# EAGLE board MK1 (EAGLE 9.6.2)
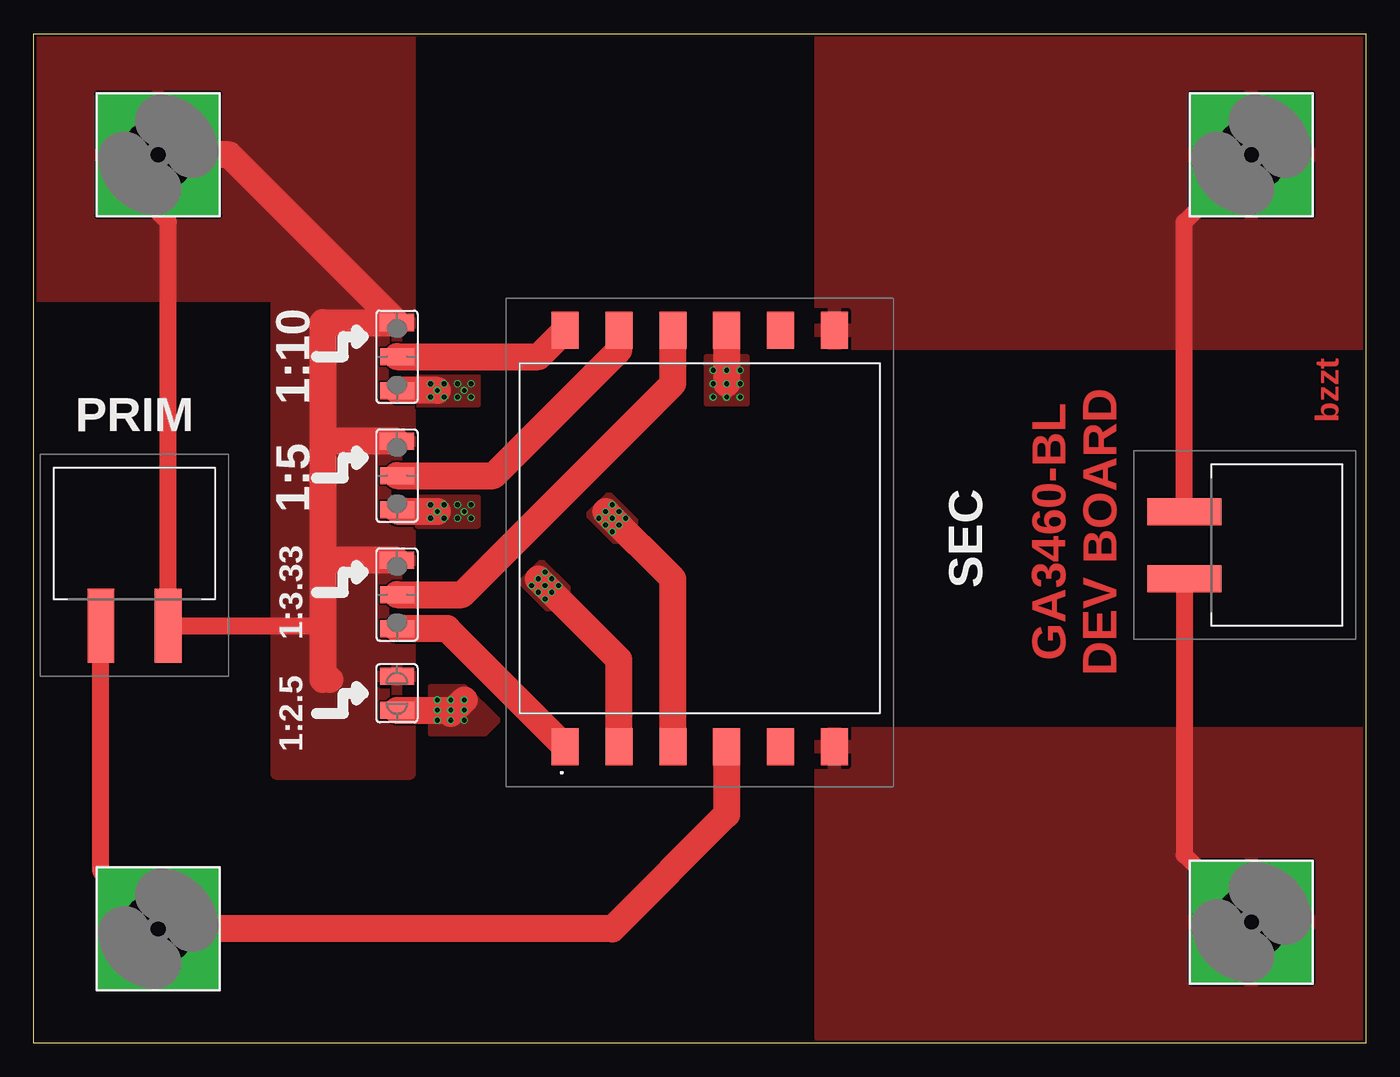
[diagram p0: board, top side]
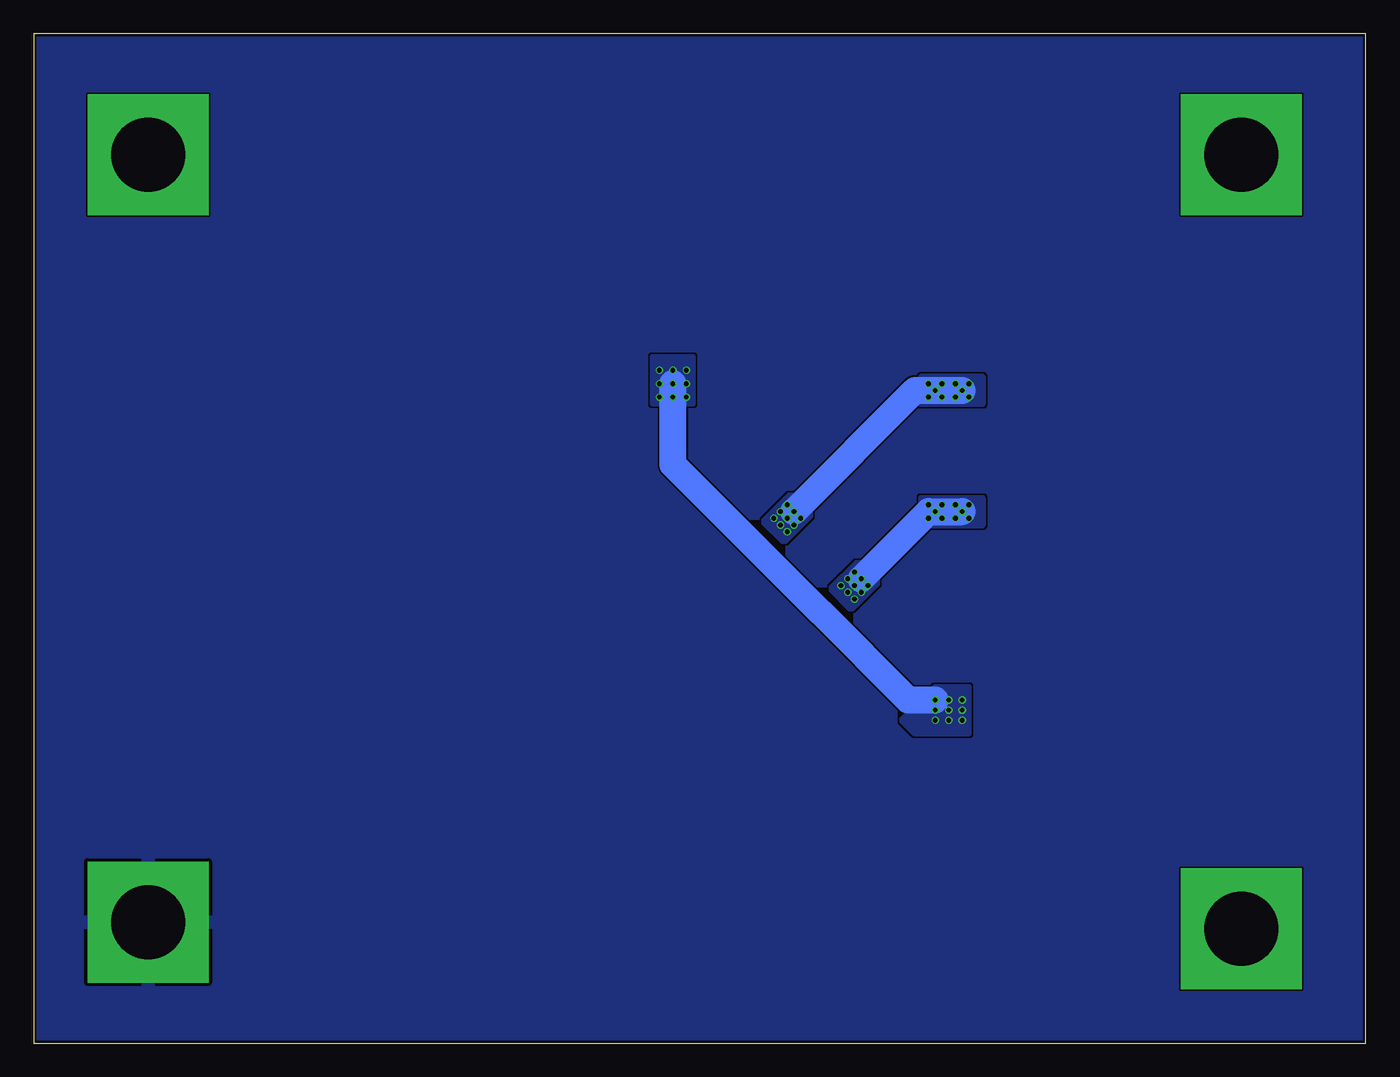
[diagram p1: board, bottom side, seen from below]

Size 99 x 75 mm. Coordinates in mm from the lower left corner, seen from the top.
Outline: 0,0 0,75 99,75 99,0 0,0
Copper layers (1*16): Top 0.035559375mm / dielectric 1.6mm / Bottom 0.035559375mm
Design rules "jlcpcb2layer *": minimum track width 5mil, minimum drill 12mil, track to track 5mil, track to pad 5mil, pad to pad 5mil, via to via 5mil, smd to smd 5mil, copper to edge 8mil, drill to drill 6mil, minimum pad ring 5mil, minimum via ring 3mil, stop-mask expansion 2.5mil, vias tented up to drill 15mil, thermal gap 10mil
Net classes: 1 Vias: clearance 0.076 mm

## Footprints (pad centres in the part's own frame; a part is rotated, then mirrored left to right if it is on the bottom)
GA3460BL = smd 2 x 2.75: 1 -10,-15.475; 2 -6,-15.475; 3 -2,-15.475; 4 2,-15.475; 5 6,-15.475; 6 10,-15.475; 7 10,15.475; 8 6,15.475; 9 2,15.475; 10 -2,15.475; 11 -6,15.475; 12 -10,15.475
5,5-PAD-SQUARE = drill 5.5 pad 9 square: B5,5 0,0
SJ_2W = smd 1.27 x 2.54: 1 -2.54,0; 2 0,0; 3 2.54,0
SJW = smd 1.27 x 2.54: 1 -1.27,0; 2 1.27,0
23059082 = smd 2 x 5.5: 1 -2.5,-4.5; 2 2.5,-4.5

## Placement (x,y rotation side)
E$1  [GA3460BL]  49.5,37.5 0 top
E$2  [5,5-PAD-SQUARE]  9.25,66 0 top
E$3  [5,5-PAD-SQUARE]  9.25,8.5 0 top
E$4  [SJ_2W]  27,33.33 270 top
E$5  [5,5-PAD-SQUARE]  90.5,66 0 top
E$6  [SJW]  27,26 90 top
E$7  [5,5-PAD-SQUARE]  90.5,9 0 top
E$8  [SJ_2W]  27,51 270 top
E$9  [SJ_2W]  27,42.17 270 top
E$10  [23059082]  90,37 270 top
E$11  [23059082]  7.5,35.5 0 top

## Library data of the parts
E$1 E$10 E$11 = SamacSys_Parts
E$2 E$3 E$5 E$7 = holes
E$4 E$6 E$8 E$9 = jumper

## Nets
1: E$1.1 E$4.3
2 [Vias]: E$1.2 E$9.3
3 [Vias]: E$1.3 E$8.3
9 [Vias]: E$1.9 E$6.1
10: E$1.10 E$4.2
11: E$1.11 E$9.2
12: E$1.12 E$8.2
GND: E$1.6 E$7.B5,5 E$10.2
OUT: E$2.B5,5 E$4.1 E$6.2 E$8.1 E$9.1 E$11.2
S$2: E$1.4 E$3.B5,5 E$11.1
SEC: E$1.7 E$5.B5,5 E$10.1

## Tracks (layer width: path | path; a pad name or v marks a point on that pad's centre or on a via)
1
  Top 2: E$1.1 30.73,30.79 E$4.3
2  (via drill 0.35)
  Top 1.27: 27.13,39.5 E$9.3
  Top 2: v37.5,34.5 v38,34 v38.5,33.5 43.5,28.5 E$1.2 | v30,39.5 27.13,39.5
  Bottom 2: v37.5,34.5 32.5,39.5 v30,39.5
  other vias: 38,35 38.5,34.5 39,34 37.5,33.5 38,33 37,34 30.5,40 31.5,40 32.5,40 32.5,39 31.5,39 30.5,39 29.5,40 29.5,39 32,39.5
  pour Top: 37.75,35.75 36.25,34.25 38.25,32.25 39.75,33.75
  pour Bottom (isolate 0.254): 37.75,35.75 36.25,34.25 38.25,32.25 39.75,33.75
  pour Bottom (isolate 0.254): 28.5,40.5 28.5,38.5 33,38.5 33,40.5
  pour Top (isolate 0.254): 28.5,40.5 28.5,38.5 33,38.5 33,40.5
  pour Top (isolate 0.254): 28.5,40.5 28.5,38.5 33,38.5 33,40.5
3  (via drill 0.35)
  Top 1.27: 27.04,48.5 E$8.3
  Top 2: E$1.3 47.5,34.5 v42.5,39.5 | v30,48.5 27.04,48.5
  Bottom 2: v42.5,39.5 33.5,48.5 v30,48.5
  other vias: 43,40 43.5,39.5 44,39 43.5,38.5 43,39 42,39 42.5,38.5 43,38 29.5,49 29.5,48 30.5,48 30.5,49 31.5,49 32.5,49 32.5,48 31.5,48 32,48.5
  pour Bottom (isolate 0.254): 42.75,40.75 41.25,39.25 43.25,37.25 44.75,38.75
  pour Top (isolate 0.254): 42.75,40.75 41.25,39.25 43.25,37.25 44.75,38.75
  pour Bottom (isolate 0.254): 28.5,49.5 28.5,47.5 33,47.5 33,49.5
  pour Top (isolate 0.254): 28.5,49.5 28.5,47.5 33,47.5 33,49.5
9  (via drill 0.35)
  Top 2: v32,25.5 31,24.5 30.77,24.73 E$6.1 | E$1.9 v51.5,49
  Bottom 1.27: 40.58,32.08 40.59,32.08
  Bottom 2: v32,25.5 34,25.5 40.58,32.08 | 40.59,32.08 51.5,42.99 v51.5,49
  other vias: 30,24.75 30,25.5 30,24 31,24 31,25.5 31,24.75 32,24.75 32,24 50.5,49 50.5,50 51.5,50 52.5,50 52.5,49 52.5,48 51.5,48 50.5,48
  pour Top: 32,26.5 29.5,26.5 29.5,23 33.5,23 34.5,24
  pour Bottom: 32,26.5 29.5,26.5 29.5,23 33.5,23 34.5,24
  pour Bottom: 53,51 50,51 50,47.5 53,47.5
  pour Top: 53,51 50,51 50,47.5 53,47.5
10
  Top 2: E$4.2 31.83,33.33 47.5,49 E$1.10
11
  Top 2: E$9.2 34.17,42.17 43.5,51.5 E$1.11
12
  Top 2: E$8.2 37.52,51 E$1.12
GND
  Top 1.27: E$10.2 85.5,14 E$7.B5,5
  pour Top: 99,23 58.5,23 58.5,0.5 99,0.5
  pour Bottom (rank 4): 108,86.5 -9.5,86.5 -9.5,-6 108,-6
OUT
  Top 1.27: E$2.B5,5 9,65.75 9,62 10,61 E$11.2 21.5,31
  Top 2: E$9.1 21.5,44.71 | 21.5,44.71 21.5,53.54 E$8.1 14.54,66 E$2.B5,5 | E$4.1 21.5,35.87 | 21.5,35.87 21.5,44.71 | 22,27.04 21.5,27.04 21.5,31 21.5,35.87
  pour Top (rank 3): 28,77.5 -2.5,77.5 -2.5,55.5 18,55.5 18,20 28,20
S$2
  Top 1.27: E$3.B5,5 5,12.75 E$11.1
  Top 2: E$1.4 51.5,17 43,8.5 E$3.B5,5
SEC
  Top 1.27: E$10.1 85.5,61 E$5.B5,5
  pour Top: 58.5,52 119,52 119,82.5 58.5,82.5

## Text on the board
Top: bzzt | GA3460-BL / DEV BOARD
tNames: 1:10 | PRIM | 1:5 | SEC | 1:3.33 | 1:2.5
tDocu: GND